# EAGLE board CT_schematic (EAGLE 7.6.0)

Size 100 x 80 mm. Coordinates in mm from the lower left corner, seen from the top.
Outline: 0,0 100,0 100,80 0,80 0,0
Copper layers (1*16): Top 0.035mm / dielectric 1.5mm / Bottom 0.035mm
Design rules "default": minimum track width 10mil, minimum drill 24mil, track to track 8mil, track to pad 8mil, pad to pad 8mil, via to via 8mil, smd to smd 8mil, copper to edge 40mil, drill to drill 8mil, minimum pad ring 10mil, minimum via ring 8mil, stop-mask expansion 4mil, vias tented up to drill 0mil, thermal gap 10mil

## Footprints (pad centres in the part's own frame; a part is rotated, then mirrored left to right if it is on the bottom)
C0603 = smd 0.8 x 0.8: 1 -0.762,0; 2 0.762,0
C0402 = smd 0.5 x 0.5: 1 -0.508,0; 2 0.508,0
C0805 = smd 1.2 x 1.3: 1 -1.016,0; 2 1.016,0
EXV-9B = smd 2.718 x 1.778: 1 -2.108,0; 2 2.108,0
C1206 = smd 1.3 x 1.6: 1 -1.524,0; 2 1.524,0
L0603 = smd 0.8 x 0.8: 1 -0.762,0; 2 0.762,0
R0603 = smd 0.8 x 0.8: 1 -0.762,0; 2 0.762,0
WLCSP64 = smd 0.34 x 0.34: A1 -1.75,1.75; A2 -1.25,1.75; A3 -0.75,1.75; A4 -0.25,1.75; A5 0.25,1.75; A6 0.75,1.75; A7 1.25,1.75; A8 1.75,1.75; B1 -1.75,1.25; B2 -1.25,1.25; B3 -0.75,1.25; B4 -0.25,1.25; B5 0.25,1.25; B6 0.75,1.25; B7 1.25,1.25; B8 1.75,1.25; C1 -1.75,0.75; C2 -1.25,0.75; C3 -0.75,0.75; C4 -0.25,0.75; C5 0.25,0.75; C6 0.75,0.75; C7 1.25,0.75; C8 1.75,0.75; D1 -1.75,0.25; D2 -1.25,0.25; D3 -0.75,0.25; D4 -0.25,0.25; D5 0.25,0.25; D6 0.75,0.25; D7 1.25,0.25; D8 1.75,0.25; E1 -1.75,-0.25; E2 -1.25,-0.25; E3 -0.75,-0.25; E4 -0.25,-0.25; E5 0.25,-0.25; E6 0.75,-0.25; E7 1.25,-0.25; E8 1.75,-0.25; F1 -1.75,-0.75; F2 -1.25,-0.75; F3 -0.75,-0.75; F4 -0.25,-0.75; F5 0.25,-0.75; F6 0.75,-0.75; F7 1.25,-0.75; F8 1.75,-0.75; G1 -1.75,-1.25; G2 -1.25,-1.25; G3 -0.75,-1.25; G4 -0.25,-1.25; G5 0.25,-1.25; G6 0.75,-1.25; G7 1.25,-1.25; G8 1.75,-1.25; H1 -1.75,-1.75; H2 -1.25,-1.75; H3 -0.75,-1.75; H4 -0.25,-1.75; H5 0.25,-1.75; H6 0.75,-1.75; H7 1.25,-1.75; H8 1.75,-1.75
SAMTEC_FTSH-105-01-L-DV-K = smd 0.762 x 2.794: 1 -2.54,-2.032; 2 -2.54,2.032; 3 -1.27,-2.032; 4 -1.27,2.032; 5 0,-2.032; 6 0,2.032; 7 1.27,-2.032; 8 1.27,2.032; 9 2.54,-2.032; 10 2.54,2.032
TDFN-8/6MM = smd 0.3 x 0.75: 1 0,0; 2 0.5,0; 3 1,0; 4 1.5,0; 5 1.5,3; 6 1,3; 7 0.5,3; 8 0,3
MOLEX_47219-2001 = smd 0.8 x 1.5: 1 3.2,-2.1; 2 2.1,-2.1; 3 1,-2.1; 4 -0.1,-2.1; 5 -1.2,-2.1; 6 -2.3,-2.1; 7 -3.4,-2.1; 8 -4.5,-2.1 | smd 1.5 x 2.05: G1 6.875,-4.7; G2 6.875,3.6; G3 -6.875,3.6; G4 -6.875,-4.7
DFN-6 = smd 0.805 x 0.3: 1 -0.952,0.5; 2 -0.952,0; 3 -0.952,-0.5; 4 0.952,-0.5; 5 0.952,0; 6 0.952,0.5 | smd 0.61 x 1.42: 7 0,0
FCI_10118193-0001LF = smd 0.4 x 1.35: 1 -1.3,2.675; 2 -0.65,2.675; 3 0,2.675; 4 0.65,2.675; 5 1.3,2.675 | smd 1.6 x 1.4: 6 -3.2,2.45; 7 3.2,2.45 | smd 1.9 x 1.9: 8 -1.2,0; 9 1.2,0 | hole 0.5: -3.3,0; 3.3,0
SOT143B = smd 1 x 0.7: 1 -0.75,-1 | smd 0.6 x 0.7: 2 0.95,-1; 3 0.95,1; 4 -0.95,1
ABS07-32.768KHZ-7-T = smd 1.1 x 2.4: 1 -2.5,0; 2 0,0
ABLS-25.000MHZ-B2F-T = smd 5.6 x 2.8: 1 -3.81,0; 2 5.69,0
LP2954 = smd 1.6 x 0.6: 1 -2.475,1.905 | smd 1.55 x 0.6: 2 -2.475,0.635; 3 -2.475,-0.635; 4 -2.475,-1.905; 5 2.475,-1.905; 6 2.475,-0.635; 7 2.475,0.635; 8 2.475,1.905
DFN8_2X3MC = smd 0.813 x 0.305: 1 -1.398,0.75; 2 -1.398,0.25; 3 -1.398,-0.25; 4 -1.398,-0.75; 5 1.398,-0.75; 6 1.398,-0.25; 7 1.398,0.25; 8 1.398,0.75 | smd 1.753 x 1.549: 9 0,0
JST-2-SMD = smd 1 x 4.6: 1 -1,-3.7; 2 1,-3.7 | smd 1.6 x 3.4: NC1 -3.4,1.5; NC2 3.4,1.5
SON-6 = smd 0.55 x 0.3: 1 -0.355,0.5 | smd 0.52 x 0.3: 2 -0.37,0; 3 -0.37,-0.5; 4 0.37,-0.5; 5 0.37,0; 6 0.37,0.5
SW_4-1437565-2 = smd 1.4 x 2.1: 1 -2.23,4.55; 2 -2.23,-4.55; 3 2.23,4.55; 4 2.23,-4.55
LGM67K-G1J2-24-Z = smd 0.8 x 1.4: A -2,0; C 0,0
NC7SZ125M5X = smd 1.3 x 0.7: 1 -1.3,0.95; 2 -1.3,0; 3 -1.3,-0.95; 4 1.3,-0.95; 5 1.3,0.95

## Placement (x,y rotation side)
C1  1e-07  [C0603]  -63.5,60.96 0 top  (outside the outline)
C2  1e-07  [C0603]  -67.31,60.96 0 top  (outside the outline)
C3  1e-07  [C0603]  -15.24,66.04 0 top  (outside the outline)
C4  1e-07  [C0603]  -19.05,66.04 0 top  (outside the outline)
C5  4.7e-06  [C0603]  -59.69,60.96 0 top  (outside the outline)
C6  1e-07  [C0603]  -22.86,66.04 0 top  (outside the outline)
C7  1e-08  [C0603]  -26.67,66.04 0 top  (outside the outline)
C8  1e-06  [C0603]  -30.48,66.04 0 top  (outside the outline)
C9  1e-11  [C0402]  -68.58,66.04 0 top  (outside the outline)
C10  1e-11  [C0402]  -15.24,71.12 0 top  (outside the outline)
C11  1e-11  [C0402]  -19.05,71.12 0 top  (outside the outline)
C12  1e-11  [C0402]  -22.86,71.12 0 top  (outside the outline)
C13  1e-07  [C0402]  -26.67,71.12 0 top  (outside the outline)
C14  1e-08  [C0402]  -30.48,71.12 0 top  (outside the outline)
C15  1e-07  [C0402]  -34.29,71.12 0 top  (outside the outline)
C16  1e-05  [C0805]  -59.69,49.53 0 top  (outside the outline)
C17  1e-07  [C0402]  -38.1,71.12 0 top  (outside the outline)
C18  1e-06  [EXV-9B]  -30.48,49.53 0 top  (outside the outline)
C19  2.2e-06  [EXV-9B]  -39.37,49.53 0 top  (outside the outline)
C20  1e-07  [C0402]  -41.91,71.12 0 top  (outside the outline)
C21  1e-05  [C1206]  -16.51,49.53 0 top  (outside the outline)
C22  1e-05  [C1206]  -22.86,49.53 0 top  (outside the outline)
C23  1e-08  [C0402]  -45.72,71.12 0 top  (outside the outline)
C24  1e-08  [C0402]  -49.53,71.12 0 top  (outside the outline)
F1  240.0  [L0603]  -34.29,66.04 0 top  (outside the outline)
R2  1000.0  [R0603]  -38.1,66.04 0 top  (outside the outline)
R4  4700.0  [R0603]  -41.91,66.04 0 top  (outside the outline)
R5  2200.0  [R0603]  -45.72,66.04 0 top  (outside the outline)
R6  2200.0  [R0603]  -49.53,66.04 0 top  (outside the outline)
R7  2200.0  [R0603]  -53.34,66.04 0 top  (outside the outline)
R8  2200.0  [R0603]  -57.15,66.04 0 top  (outside the outline)
R9  10000.0  [R0603]  -15.24,60.96 0 top  (outside the outline)
R10  10000.0  [R0603]  -20.32,60.96 0 top  (outside the outline)
R11  10000.0  [R0603]  -25.4,60.96 0 top  (outside the outline)
R12  10000.0  [R0603]  -30.48,60.96 0 top  (outside the outline)
R13  10000.0  [R0603]  -35.56,60.96 0 top  (outside the outline)
R14  5.0  [R0603]  -60.96,66.04 0 top  (outside the outline)
R15  100000.0  [R0603]  -15.24,55.88 0 top  (outside the outline)
R16  100000.0  [R0603]  -20.32,55.88 0 top  (outside the outline)
R17  100000.0  [R0603]  -25.4,55.88 0 top  (outside the outline)
R18  100000.0  [R0603]  -30.48,55.88 0 top  (outside the outline)
R19  100000.0  [R0603]  -35.56,55.88 0 top  (outside the outline)
R20  100000.0  [R0603]  -40.64,55.88 0 top  (outside the outline)
R21  100000.0  [R0603]  -45.72,55.88 0 top  (outside the outline)
R22  100000.0  [R0603]  -50.8,55.88 0 top  (outside the outline)
R23  101022.32  [R0603]  -64.77,49.53 0 top  (outside the outline)
R24  100000.0  [R0603]  -55.88,55.88 0 top  (outside the outline)
R25  10000.0  [R0603]  -40.64,60.96 0 top  (outside the outline)
R26  10000.0  [R0603]  -45.72,60.96 0 top  (outside the outline)
R27  18000.0  [R0603]  -50.8,60.96 0 top  (outside the outline)
R28  470000.0  [R0603]  -60.96,55.88 0 top  (outside the outline)
R29  120000.0  [R0603]  -66.04,55.88 0 top  (outside the outline)
R30  2000.0  [R0603]  -64.77,66.04 0 top  (outside the outline)
R31  10000.0  [R0603]  -55.88,60.96 0 top  (outside the outline)
U1  STM32L151RDY6  [WLCSP64]  -41.91,33.02 0 top  (outside the outline)
U2  FTSH-105-01-L-DV-K  [SAMTEC_FTSH-105-01-L-DV-K]  -55.88,7.62 0 top  (outside the outline)
U3  24AA04-I/MC  [TDFN-8/6MM]  -55.88,20.32 0 top  (outside the outline)
U4  0472192001  [MOLEX_47219-2001]  -22.86,8.89 0 top  (outside the outline)
U5  SI7006-A20-IM  [DFN-6]  -66.04,69.85 0 top  (outside the outline)
U6  10118193-0001LF  [FCI_10118193-0001LF]  -50.8,33.02 0 top  (outside the outline)
U7  prtr5v0u2ax  [SOT143B]  -62.23,71.12 0 top  (outside the outline)
U8  ABS07-32.768KHZ-7-T  [ABS07-32.768KHZ-7-T]  -49.53,43.18 0 top  (outside the outline)
U9  ABLS-25.000MHZ-B2F-T  [ABLS-25.000MHZ-B2F-T]  -26.67,43.18 0 top  (outside the outline)
U10  LP2954AIMX/NOPB  [LP2954]  -25.4,34.29 0 top  (outside the outline)
U11  MCP73831T-2ACI/MC  [DFN8_2X3MC]  -20.32,74.93 0 top  (outside the outline)
U12  S2B-PH-SM4-TB(LF)(SN)  [JST-2-SMD]  -41.91,22.86 0 top  (outside the outline)
U13  TPS3895ADRYR  [SON-6]  -13.97,74.93 0 top  (outside the outline)
U14  4-1437565-2  [SW_4-1437565-2]  -27.94,22.86 0 top  (outside the outline)
U15  Q65110A2395  [LGM67K-G1J2-24-Z]  -58.42,41.91 0 top  (outside the outline)
U16  nc7sz125m5x  [NC7SZ125M5X]  -46.99,49.53 0 top  (outside the outline)
U17  nc7sz125m5x  [NC7SZ125M5X]  -53.34,49.53 0 top  (outside the outline)

## Library data of the parts
C1-C24 F1 R2 R4-R31 U1-U17 = circuit_tree

## Nets
CLK_CRYSTAL_U1_B7: C9.1 U1.B7 U8.1
CLK_CRYSTAL_U1_B8: C10.1 U1.B8 U8.2
CLK_CRYSTAL_U1_D7: C11.1 U1.D7 U9.1
CLK_CRYSTAL_U1_D8: C12.1 U1.D8 U9.2
GND: C1.2 C2.2 C3.2 C4.2 C5.2 C6.2 C7.2 C8.2 C9.2 C10.2 C11.2 C12.2 C13.2 C14.2 C15.2 C16.2 C17.2 C18.2 C19.2 C20.2 C21.2 C22.2 C23.2 C24.2 R2.2 R9.2 R13.2 R14.2 R24.2 R27.2 R29.2 R30.2 U1.A7 U1.B1 U1.E7 U1.F5 U1.H2 U2.3 U2.5 U3.4 U3.7 U4.6 U4.G1 U4.G2 U4.G3 U4.G4 U5.2 U5.7 U6.5 U6.6 U6.7 U6.8 U6.9 U7.1 U10.4 U11.6 U11.9 U12.2 U13.2 U15.C U16.2 U16.3 U17.1 U17.3
INPUT_USBPOWER_5V: C21.1 R31.2 U6.1 U7.4 U11.1 U11.2
NET_U1_A6: R9.1 U1.A6
NET_U1_B5: R5.1 U1.B5 U5.6
NET_U1_B6: R6.1 U1.B6 U5.1
NET_U1_C6: C6.1 U1.C6
NET_U1_C7: R4.1 U1.C7 U17.4
NET_U1_F3: R8.1 U1.F3 U3.5
NET_U1_G3: R7.1 U1.G3 U3.6
NET_U1_G8: C7.1 C8.1 F1.1 U1.G8
NET_U1_H7: U15.A
NET_U1_H8: U14.3 U14.4
NET_U2_9: R14.1 U2.9
NET_U10_3: R22.1 U10.3
NET_U10_5: R21.1 U10.5
NET_U10_7: R23.2 R24.1 U10.7
NET_U11_5: R31.1 U11.5
NET_U11_8: R30.1 U11.8
NET_U13_1: R26.1 R27.1 U13.1
NET_U13_3: R28.2 R29.1 U13.3
NET_U13_4: R25.1 U13.4 U16.4 U17.2
NET_U14_1: R2.1 U14.1 U14.2
PROC_SDIO_CK: R16.1 U1.C4 U4.5
PROC_SDIO_CMD: R15.1 U1.A3 U4.3
PROC_SDIO_D0: R17.1 U1.E3 U4.7
PROC_SDIO_D1: R18.1 U1.D1 U4.8
PROC_SDIO_D2: R19.1 U1.A2 U4.1
PROC_SDIO_D3: R20.1 U1.B3 U4.2
PROC_SYS_JTCK_SWCLK: R13.1 U1.B2 U2.4
PROC_SYS_JTDI: R11.1 U1.C3 U2.8
PROC_SYS_JTDO_TRACESWO: U1.A4 U2.6
PROC_SYS_JTMS_SWDIO: R12.1 U1.D4 U2.2
PROC_USB_DM: U1.C1 U6.2 U7.3
PROC_USB_DP: U1.C2 U6.3 U7.2
RST_OUT_U2_JTAG_RST_B: R10.1 U2.10 U16.1
VCC_S1_3V7: C18.1 C22.1 R22.2 U10.8 U11.3 U11.4 U12.1
VCC_TIER1_2V5: C1.1 C2.1 C3.1 C4.1 C5.1 C13.1 C14.1 C15.1 C16.1 C17.1 C19.1 C20.1 C23.1 C24.1 F1.2 R4.2 R5.2 R6.2 R7.2 R8.2 R10.2 R11.2 R12.2 R15.2 R16.2 R17.2 R18.2 R19.2 R20.2 R21.2 R23.1 R25.2 R26.2 R28.1 U1.A1 U1.A8 U1.G6 U1.H1 U2.1 U3.8 U4.4 U5.5 U10.1 U13.6 U16.5 U17.5

## Tracks (layer width: path | path; a pad name or v marks a point on that pad's centre or on a via)
CLK_CRYSTAL_U1_B7  (2 unrouted)
CLK_CRYSTAL_U1_B8  (2 unrouted)
CLK_CRYSTAL_U1_D7  (2 unrouted)
CLK_CRYSTAL_U1_D8  (2 unrouted)
GND  (63 unrouted)
INPUT_USBPOWER_5V  (5 unrouted)
NET_U1_A6  (1 unrouted)
NET_U1_B5  (2 unrouted)
NET_U1_B6  (2 unrouted)
NET_U1_C6  (1 unrouted)
NET_U1_C7  (2 unrouted)
NET_U1_F3  (2 unrouted)
NET_U1_G3  (2 unrouted)
NET_U1_G8  (3 unrouted)
NET_U1_H8  (1 unrouted)
NET_U2_9  (1 unrouted)
NET_U10_3  (1 unrouted)
NET_U10_5  (1 unrouted)
NET_U10_7  (2 unrouted)
NET_U11_5  (1 unrouted)
NET_U11_8  (1 unrouted)
NET_U13_1  (2 unrouted)
NET_U13_3  (2 unrouted)
NET_U13_4  (3 unrouted)
NET_U14_1  (2 unrouted)
PROC_SDIO_CK  (2 unrouted)
PROC_SDIO_CMD  (2 unrouted)
PROC_SDIO_D0  (2 unrouted)
PROC_SDIO_D1  (2 unrouted)
PROC_SDIO_D2  (2 unrouted)
PROC_SDIO_D3  (2 unrouted)
PROC_SYS_JTCK_SWCLK  (2 unrouted)
PROC_SYS_JTDI  (2 unrouted)
PROC_SYS_JTDO_TRACESWO  (1 unrouted)
PROC_SYS_JTMS_SWDIO  (2 unrouted)
PROC_USB_DM  (2 unrouted)
PROC_USB_DP  (2 unrouted)
RST_OUT_U2_JTAG_RST_B  (2 unrouted)
VCC_S1_3V7  (6 unrouted)
VCC_TIER1_2V5  (45 unrouted)